# Altium PCB mew-0.2.1-full-tsc.pcbdoc (part 2 of 2)
Units mil, origin at the board's own origin, x right, y up, seen from the top; angles counter-clockwise.
Board outline 3463 x 2680.79 mil, 2 copper layers (Top Layer, Bottom Layer); 49 components, 103 nets, 267 pads, 123 vias.
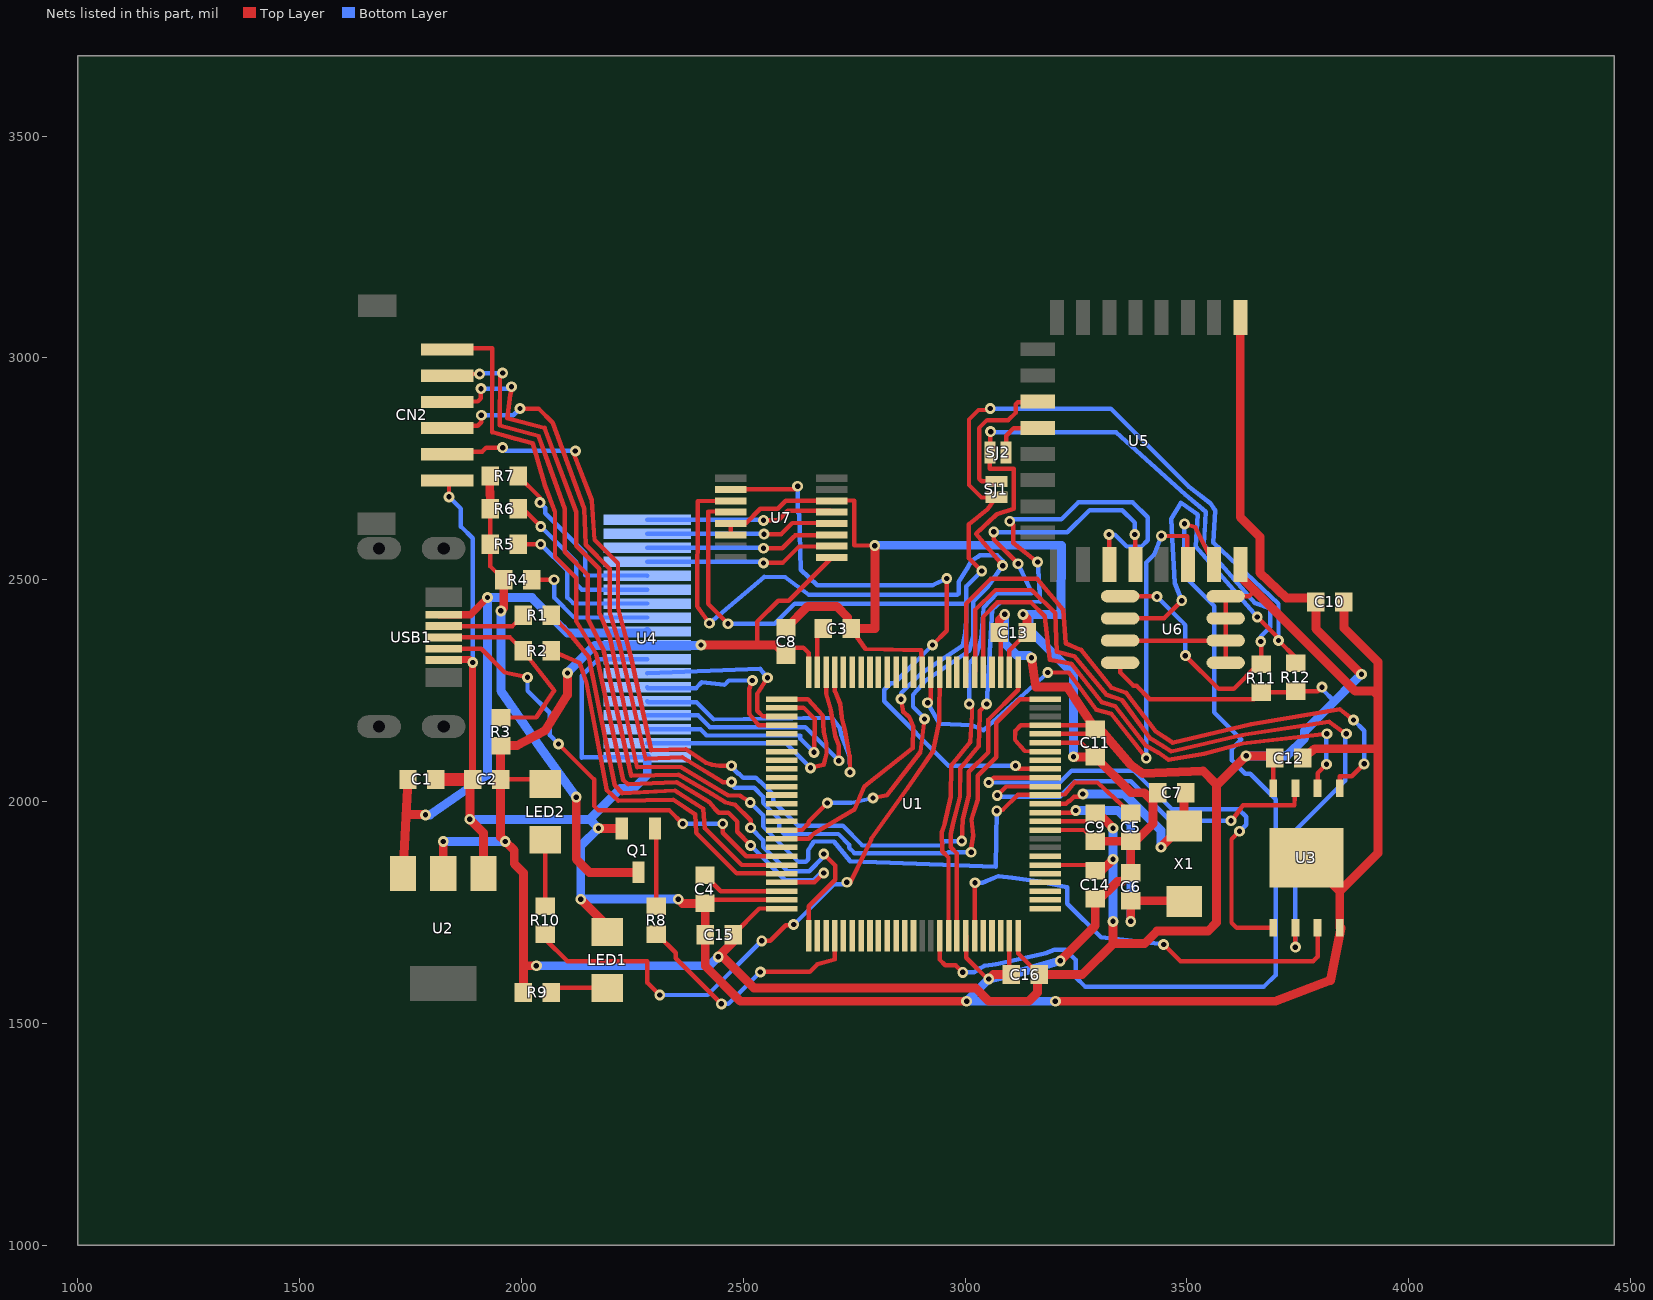
[diagram p2: the nets of this part, all layers, seen from the top]

## Via types
v1: diameter 24.4, hole 12, Top Layer to Bottom Layer, 123 vias

## Nets (pads, with @x,y where several pads share a name; then routed paths per layer and width w, separated by ;. In a path a pad name is that pad's centre, name@x,y a point inside that pad or via, vN(x,y) a via of type N, cw(c..) or ccw(c..) an arc to the next point about the centre after c; other vN are vias at no path point)
3UY46H: U1.96
$BoardOutlineNet: 
BT_MISO: U1.93 U5.19 | length 1656.9
  Top Layer w10: U1.93@2981.5,1697.8 2981.5,1882.8 2967.5,1896.8 2967.5,1925.8 2972.5,1947.8 2988.5,2010.8 2989.5,2074.8 3030.5,2124.8 3033.5,2196.8 3033.5,2204.8 v1(3048.5,2219.8) ; v1(3100.5,2631.8) 3108.5,2623.8 3108.5,2582.8 v1(3163.5,2539.8) ; v1(3324.5,2601.8) 3325,2601.3 U5.19@3325,2534.5
  Bottom Layer w10: v1(3048.5,2219.8) 3061.5,2433.8 3079.5,2448.8 3169.5,2450.8 v1(3163.5,2539.8) ; v1(3100.5,2631.8) 3104.5,2635.8 3216.5,2635.8 3255.5,2674.8 3377.5,2674.8 3411.5,2640.8 3411.5,2588.8 3397.5,2574.8 3364.5,2574.8 3337.5,2601.8 v1(3324.5,2601.8)
BT_MOSI: U1.92 U5.20 | length 1509.4
  Top Layer w10: U1.92@2962.5,1697.8 2962.5,1873.8 2948.5,1887.8 2947.5,1930.8 2954.5,1950.8 2967.5,2010.8 2968.5,2080.8 3011.5,2133.8 3015.5,2195.8 3015.5,2213.8 v1(3009.5,2219.8) ; v1(3064.5,2607.8) 3064.5,2590.8 v1(3119.5,2535.8) ; v1(3382.5,2601.8) 3384,2600.3 U5.20@3384,2534.5
  Bottom Layer w10: v1(3009.5,2219.8) 3009.5,2310.8 3025.5,2329.8 3036.1,2366.3 3041.5,2436.8 3072.5,2469.8 3150.5,2469.8 v1(3119.5,2535.8) ; v1(3064.5,2607.8) 3065.5,2606.8 3230.5,2606.8 3280.5,2656.8 3354.5,2656.8 3382.5,2628.8 v1(3382.5,2601.8)
BT_PWR_ON: U1.36 U5.22 | length 1369.3
  Top Layer w10: v1(2915.5,2222.8) 2922.5,2229.8 U1.36@2922.5,2291.8 ; v1(3186.5,2290.8) 3233.5,2290.8 3295.5,2206.8 3329.5,2197.8 v1(3408.5,2097.8) ; v1(3442.5,2598.8) 3500.5,2597.8 3500.5,2581.8 U5.22@3502.1,2534.8
  Bottom Layer w10: v1(2915.5,2222.8) 2942.5,2174.8 3014.5,2171.8 3041.5,2160.8 v1(3186.5,2290.8) ; v1(3408.5,2097.8) 3408.5,2538.8 3425.5,2555.8 v1(3442.5,2598.8)
BT_RESET: U1.91 U5.23 | length 2153.8
  Top Layer w10: U1.91@2942.5,1697.8 2942.5,1643.8 2955.5,1630.8 2978.5,1630.8 v1(2994.5,1614.8) ; v1(3494.5,2625.8) 3518.5,2618.8 U5.23@3561.2,2534.8 ; U5.23@3561.2,2534.8 3558.5,2531.8 U5.23@3561.2,2534.8
  Bottom Layer w10: v1(2994.5,1614.8) 3019.5,1614.8 3033.5,1623.8 3044.5,1629.8 3069.5,1632.8 3181.5,1657.8 3201.5,1665.8 3226.5,1665.8 3249.5,1642.8 3249.5,1603.8 3270.5,1582.8 3673.5,1582.8 3700.5,1608.8 3700.5,2004.8 3642.5,2062.8 3631.5,2062.8 3601.5,2092.8 3601.5,2118.8 3622.5,2139.8 3561.5,2200.8 3561.5,2440.6 3494.5,2507.6 v1(3494.5,2625.8)
BT_SCL: R12.2 SJ1.1 U1.67 U6.6 U7.12 | length 4054.9
  Top Layer w9: v1(3056.5,2885.8) 3053.5,2882.8 3030.5,2882.8 3008.5,2860.8 3008.5,2713.8 3036.5,2685.8 SJ1.1@3070.5,2685.8
  Top Layer w10: v1(2465.5,2400.8) 2420.5,2445.8 2420.5,2653.8 U7.12@2471.5,2652.8 ; U1.67@2586.5,1915.8 2647.5,1915.8 2660.5,1928.8 2750.5,1981.8 2773.5,2034.8 2881.5,2119.8 2883.5,2167.8 2874.5,2189.8 2860.5,2201.8 v1(2855.5,2230.8) ; v1(3037.5,2519.8) 3008.5,2548.8 3008.5,2624.8 3050.5,2658.8 SJ1.1@3070.5,2685.8 ; U6.6@3349.5,2412.8 3448.5,2412.8 v1(3488.5,2452.8) ; v1(3658.5,2415.8) 3706.5,2367.8 v1(3706.5,2362.8) 3745.5,2323.8 R12.2@3745.5,2311.4
  Bottom Layer w10: v1(2465.5,2400.8) 2570.5,2400.8 2615.5,2445.8 2736.5,2445.8 3002.5,2446.1 3002.5,2439.8 ; v1(2855.5,2230.8) 2855.5,2243.8 2900.5,2288.8 2994.5,2351.8 3000.5,2379.8 3002.5,2408.8 3002.5,2484.8 v1(3037.5,2519.8) ; v1(3056.5,2885.8) 3328.5,2885.8 3504.5,2709.8 3552.5,2672.8 3563.5,2656.8 3559.5,2583.8 3706.5,2445.8 v1(3706.5,2362.8) ; v1(3488.5,2452.8) 3472.5,2492.8 3468.5,2571.8 3464.5,2636.8 3486.5,2673.8 3524.5,2646.8 3519.5,2574.8 v1(3658.5,2415.8)
BT_SDA: R11.1 SJ2.1 U1.66 U6.5 U7.11 | length 3921.8
  Top Layer w10: v1(2423.5,2401.8) 2396.5,2439.8 2397.5,2676.8 U7.11@2471.5,2677.8 ; U1.66@2586.6,1935.7 2632.5,1935.7 2647.5,1950.8 2647.5,1954.8 v1(2689.5,1996.8) ; v1(2792.5,2007.8) 2823.5,2013.8 2899.5,2111.8 v1(2908.5,2185.8) ; v1(3057.5,2833.8) 3056.5,2832.8 SJ2.1@3056.5,2786.8 3055.5,2749.8 3109.2,2749.8 3109.5,2659.8 3071.5,2647.8 3024.5,2603.8 v1(3084.5,2531.8) ; U6.5@3349.5,2462.8 3431.5,2462.8 v1(3432.5,2461.8) ; v1(3496.5,2328.8) 3571.5,2253.8 3605.5,2253.8 3660.9,2309.2 3667.5,2309.2 3667.5,2359.8 v1(3666.5,2360.8)
  Bottom Layer w10: v1(2423.5,2401.8) 2547.5,2506.8 2594.5,2505.8 2647.5,2465.8 2982.5,2465.8 2985.5,2468.8 2985.5,2493.8 3005.5,2526.8 3014.4,2542.8 3033.5,2554.8 3072.5,2554.8 3084.5,2542.8 v1(3084.5,2531.8) 3051.3,2483.6 3018.5,2450.8 3018.5,2372.8 3009.5,2339.8 2911.5,2272.8 2882.5,2240.8 2882.5,2213.8 2908.5,2187.8 v1(2908.5,2185.8) ; v1(2689.5,1996.8) 2743.5,1996.8 v1(2792.5,2007.8) ; v1(3057.5,2833.8) 3058.5,2832.8 3340.5,2832.8 3496.5,2691.8 3542.5,2652.8 3538.5,2579.8 3654.5,2446.8 3687.5,2435.5 3687.5,2392.8 3666.5,2371.8 v1(3666.5,2360.8) ; v1(3432.5,2461.8) 3496.5,2397.8 v1(3496.5,2328.8)
DISP_BL: R8.1 U1.79 | length 567
  Top Layer w10: R8.1@2303.55,1700.4 2305.9,1700.4 2347.5,1658.8 2347.5,1646.8 v1(2450.5,1543.8) ; v1(2538.5,1615.8) 2649.5,1615.8 2666.5,1632.8 2706.5,1643.8 U1.79@2706.65,1697.65
  Bottom Layer w10: v1(2450.5,1543.8) 2466.5,1543.8 v1(2538.5,1615.8)
DISP_CS: U1.47 U4.5 | length 796.8
  Top Layer w10: U1.47@2706.5,2291.8 2706.5,2248.8 2718.5,2219.8 2721.5,2190.8 2729.5,2157.8 2739.5,2102.8 v1(2740.5,2065.8)
  Bottom Layer w10: U4.5@2283.5,2225.8 2285.5,2223.8 2394.5,2223.8 2433.5,2184.8 2700.5,2188.8 2717.5,2165.8 2720.5,2150.8 2739.5,2100.8 v1(2740.5,2065.8)
DISP_DC: U1.48 U4.4 | length 678.2
  Top Layer w10: U1.48@2686.5,2291.8 2686.5,2243.8 2697.5,2205.8 2702.5,2174.8 2707.5,2147.8 2715.5,2124.8 v1(2715.5,2091.8)
  Bottom Layer w10: U4.4@2283.5,2194.3 2398,2194.3 2424.5,2167.8 2639.5,2167.8 v1(2715.5,2091.8)
DM: R1.1 USB1.2 | length 200.3
  Top Layer w10: USB1.2@1813.9,2395.4 1979.7,2395.4 R1.1@2004.1,2419.75
DP: R2.1 R3.1 USB1.3 | length 467.9
  Top Layer w10: USB1.3@1813.9,2369.8 1953.5,2369.8 1974.1,2369.8 R2.1@2004.1,2339.75 2073.5,2249.8 2033.5,2190.4 R3.1@1953.5,2189.2
DUART-RX: CN2.2 U1.26 | length 2245.2
  Top Layer w10: CN2.2@1827.51,2786.8 1829.51,2788.8 1911.5,2788.8 1920.5,2797.8 v1(1957.5,2797.8) ; v1(2121.5,2790.24) 2117.1,2785.8 2158.5,2679.8 2164.5,2589.8 2217.5,2536.8 2217.5,2436.8 2247.5,2322.8 2292.5,2115.8 2370.7,2117.9 2415.5,2087.8 2429.5,2082.8 2445.5,2080.8 v1(2473.5,2080.8) ; v1(2992.5,1910.8) 2994.5,1959.8 3008.5,2012.8 3008.5,2066.8 3052.5,2110.8 3052.5,2184.8 3119.5,2251.8 U1.26@3119.5,2291.8
  Bottom Layer w10: v1(1957.5,2797.8) 1965.06,2790.24 v1(2121.5,2790.24) ; v1(2473.5,2080.8) 2479.5,2074.8 2479.5,2071.8 2488.5,2062.8 2490.5,2062.8 2499.5,2053.8 2528.5,2053.8 2536.5,2045.8 2537.5,2045.8 2567.5,2015.8 2567.5,2000.8 2622.5,1945.8 2724.5,1945.8 2768.5,1900.8 2944.5,1900.8 2954.5,1910.8 v1(2992.5,1910.8)
DUART-TX: CN2.3 U1.25 | length 2373.5
  Top Layer w10: CN2.3@1827.51,2845.82 1828.49,2846.8 1901.5,2846.8 1909.5,2854.8 v1(1909.5,2870.8) ; v1(1996.5,2885.8) 2038.5,2885.8 2070.5,2853.8 2141.5,2659.8 2144.5,2578.8 2198.5,2524.8 2198.5,2427.8 2221.5,2351.8 2279.5,2096.8 2362.5,2099.8 2453.5,2043.8 v1(2473.5,2043.8) ; v1(3013.5,1885.8) 3013.5,1895.8 3018.5,1923.8 3014.5,1959.8 3028.5,2003.8 3028.5,2057.8 3070.5,2099.8 3070.5,2177.8 3123.5,2230.8 U1.25@3180.5,2230.8
  Bottom Layer w10: v1(1909.5,2870.8) 1981.5,2870.8 v1(1996.5,2885.8) ; v1(2473.5,2043.8) 2480.5,2030.8 2524.5,2030.8 2544.5,2010.8 2544.5,1996.8 2581.5,1959.8 2581.5,1936.8 2591.5,1926.8 2714.5,1926.8 2738.5,1902.8 2738.5,1895.8 2750.5,1883.8 2960.5,1883.8 2962.5,1885.8 v1(3013.5,1885.8)
FLASH-CS: U1.16 U3.1 | length 1117.3
  Top Layer w10: v1(3053.5,2042.8) 3064.5,2053.8 U1.16@3180.5,2053.8 ; v1(3618.5,1932.8) 3600.5,1914.8 3600.5,1726.8 3612,1715.3 U3.1@3694.5,1715.3
  Bottom Layer w10: v1(3053.5,2042.8) 3213.5,2042.8 3240.5,2069.8 3379.5,2069.8 3466.5,1982.8 3616.5,1982.8 3633.5,1965.8 3633.5,1947.8 v1(3618.5,1932.8)
FLASH-HOLD: U1.15 U3.7 | length 894.8
  Top Layer w10: v1(3072.5,2013.8) 3092.5,2033.8 U1.15@3180.5,2033.8 ; v1(3599.5,1956.8) 3607.5,1964.8 3626.5,1991.8 3742.5,1991.8 U3.7@3744.5,2030.3
  Bottom Layer w10: v1(3072.5,2013.8) 3075.5,2010.8 3213.5,2010.8 3248.5,2045.8 3373.5,2045.8 3462.5,1956.8 v1(3599.5,1956.8)
FLASH-WP: U1.95 U3.3 | length 1051.8
  Top Layer w10: U1.95@3021.5,1697.8 3021.5,1815.8 v1(3022.5,1816.8) ; v1(3447.5,1677.8) 3485.5,1639.8 3784.5,1639.8 3794.5,1649.8 U3.3@3794.5,1715.8
  Bottom Layer w10: v1(3022.5,1816.8) 3039.5,1816.8 3075.5,1831.8 3106.5,1827.8 3170.5,1818.8 3230.5,1806.8 3230.5,1769.8 3306.7,1693.6 v1(3447.5,1677.8)
GND: C1.2 C2.2 C3.1 C4.1 C5.1 C6.1 C7.1 C8.1 C9.1 C10.1 C11.1 C12.1 C13.1 C14.1 C15.1 C16.1 CN2.1 LED1.2 Q1.2 U1.10 U1.20 U1.27 U1.37 U1.74 U1.94 U1.99 U2.1 U3.0 U3.4 U4.1 U4.8 U5.24 U6.1 U6.2 U6.3 U6.4 U6.7 U7.6 U7.13 U7.14 USB1.5 | length 10476.7
  Top Layer w10: CN2.1@1827.38,2727.68 1836.5,2718.56 v1(1836.5,2686.8) ; C4.1@2413.5,1770.4 2421.9,1778.8 U1.74@2586.5,1778.8 ; U7.14@2471.5,2600.8 U7.13@2471.5,2626.8 2505.5,2626.8 2538.5,2659.8 2577.5,2659.8 2595.5,2677.8 U7.6@2699.5,2677.8 2700.5,2678.8 2750.5,2677.8 2750.5,2577.8 2793.5,2576.8 v1(2796.5,2576.8) ; C3.1@2742.9,2389.85 2775.5,2343.8 2901.5,2340.8 U1.37@2903.5,2291.8 ; U1.94@3001.5,1697.8 3002.5,1696.8 3002.5,1647.8 3050.5,1599.8 v1(3053.5,1599.8) ; U1.99@3099.5,1697.8 3099.5,1614.4 C16.1@3104.1,1609.75 ; U1.27@3099.5,2291.8 3099.5,2340.4 C13.1@3139.9,2380.85 ; U1.10@3180.5,1935.8 3268.1,1935.8 C9.1@3293.5,1910.4 ; U1.20@3180.5,2132.8 3261.1,2132.8 C11.1@3293.5,2100.4 ; U6.7@3349.5,2362.8 U6.2@3587.5,2362.8 ; U6.1@3587.5,2312.8 U6.2@3587.5,2362.8 ; 3652.7,2475.6 3639.9,2462.8 U6.4@3587.5,2462.8 U6.3@3587.5,2412.8 U6.2@3587.5,2362.8
  Top Layer w16: USB1.5@1813.9,2318.6 1815.1,2319.8 1883.5,2319.8 v1(1889.91,2313.39) C2.2@1889.9,2049.85
  Top Layer w20: C2.2@1889.9,2049.85 1883.5,2043.4 v1(1883.5,1959.8) 1914.1,1929.2 U2.1@1914.1,1837.8 ; v1(2133.5,1779.8) 2193.5,1719.8 LED1.2@2193.5,1705.8 ; v1(2173.5,1939.8) 2174.3,1939 Q1.2@2226.1,1939 ; v1(2353.5,1779.8) 2362.9,1770.4 2413.5,1770.4 2414.1,1769.8 C15.1@2414.1,1699.75 2414.1,1629.2 2493.5,1549.8 v1(3003.5,1549.8) ; C8.1@2596.5,2392.2 2597.9,2392.2 2645.5,2439.8 2710.5,2439.8 2735.5,2414.8 2735.5,2397.2 C3.1@2742.9,2389.85 2796.5,2389.8 v1(2796.5,2576.8) ; v1(3053.5,1599.8) 3063.5,1609.8 C16.1@3104.1,1609.75 ; v1(3130.5,2421.8) 3139.9,2412.4 C13.1@3139.9,2380.85 ; v1(3203.5,1549.8) 3699.5,1549.8 3823.5,1596.8 3847.2,1714.8 U3.4@3844.5,1715.3 3844.5,1797.8 ; v1(3214.5,1640.8) 3293.5,1719.8 3293.5,1780.4 3304.1,1780.4 3333.5,1809.8 3343.5,1819.8 3354.1,1819.8 3373.5,1839.2 C5.1@3373.5,1910.4 ; v1(3244.5,2100.8) 3244.9,2100.4 3293.5,2100.4 3374.1,2019.8 3403.5,2019.8 3423.5,1999.8 3423.5,1949.8 3384.1,1910.4 C5.1@3373.5,1910.4 ; C9.1@3293.5,1910.4 C5.1@3373.5,1910.4 ; 3423.5,1983.5 3423.5,2009.2 C7.1@3434.1,2019.75 ; U5.24@3620.3,2534.5 3620.3,2508 3879.5,2248.8 3921.5,2248.8 3930.5,2239.8 ; C12.1@3760.9,2097.85 3788.5,2118.8 3930.5,2118.8 ; U3.0@3769.5,1872.8 3844.5,1797.8 ; C10.1@3853.9,2449.85 3853.9,2391.4 3930.5,2314.8 3930.5,2239.8 ; 3844.5,1797.8 3930.5,1883.8 3930.5,2118.8 ; 3930.5,2118.8 3930.5,2239.8
  Top Layer w30: C1.2@1807.1,2049.75 C2.2@1889.9,2049.85
  Bottom Layer w10: v1(1836.5,2686.8) 1863.5,2659.8 1863.5,2619.8 1889.9,2593.4 v1(1889.91,2313.39) ; U4.1@2283.5,2099.8 2136.5,2099.8 2135.5,2098.8 2135.5,2283.8 2172.5,2320.8 2282.97,2320.8 U4.8@2283.5,2320.3
  Bottom Layer w20: v1(1883.5,1959.8) 2153.5,1959.8 ; U4.1@2283.5,2099.8 2283.5,2059.8 2253.5,2029.8 2223.5,2029.8 2153.5,1959.8 ; v1(2353.5,1779.8) v1(2133.5,1779.8) 2133.5,1899.8 v1(2173.5,1939.8) 2153.5,1959.8 ; v1(2796.5,2576.8) 2797.5,2577.8 3216.9,2577.8 3216.5,2421.8 v1(3130.5,2421.8) 3144.5,2407.8 3144.5,2386.8 3244.5,2286.8 v1(3244.5,2100.8) ; v1(3203.5,1549.8) v1(3003.5,1549.8) v1(3053.5,1599.8) 3131.5,1616.8 v1(3214.5,1640.8)
ID: U1.69 USB1.4 | length 1056.5
  Top Layer w10: USB1.4@1813.9,2344.2 1909.1,2344.2 1962.4,2290.9 v1(2013.5,2279.8) ; v1(2083.5,2129.8) 2163.5,2049.8 2163.5,1989.8 2173.5,1979.8 2333.5,1979.8 v1(2363.5,1949.8) ; v1(2453.5,1949.8) 2453.5,1929.8 2506.5,1876.8 U1.69@2586.5,1876.8
  Bottom Layer w10: v1(2013.5,2279.8) 2013.5,2249.8 2063.5,2199.8 2063.5,2149.8 v1(2083.5,2129.8) ; v1(2363.5,1949.8) v1(2453.5,1949.8)
Q1_1: Q1.1 R8.2 | length 176.7
  Top Layer w10: Q1.1@2300.9,1939 2303.5,1936.4 R8.2@2303.5,1763.4
R4_2: Q1.3 R4.2 R5.2 R6.2 R7.2 | length 1071.1
  Top Layer w10: R6.2@1929.9,2659.85 R5.2@1929.9,2579.85 1929.9,2529.8 R4.2@1959.9,2499.85
  Top Layer w20: R7.2@1929.5,2718.8 1928.5,2714.8 R6.2@1929.9,2659.85 ; v1(1953.5,2429.8) 1959.9,2436.2 R4.2@1959.9,2499.85 ; v1(2123.5,2009.8) 2123.5,1869.8 2153.5,1839.8 2262.7,1839.8 Q1.3@2263.5,1840.6
  Bottom Layer w20: v1(1953.5,2429.8) 1953.5,2249.8 2043.5,2119.8 v1(2123.5,2009.8)
R9_2: LED1.1 R9.2 | length 130.5
  Top Layer w10: R9.2@2067.1,1569.75 2077.1,1579.8 LED1.1@2193.5,1579.8
R10_2: LED2.2 R10.2 | length 150.4
  Top Layer w10: R10.2@2053.5,1763.4 LED2.2@2053.5,1913.8
RESET: C5.2 CN2.4 U1.14 | length 2598.6
  Top Layer w10: CN2.4@1827.55,2904.39 1830.14,2901.8 1901.5,2901.8 1908.5,2908.8 v1(1908.5,2930.8) ; v1@1982.5,2938.8 1981,2938.9 1974.5,2916.8 1967.5,2863.8 2051.9,2842.2 2123.5,2652.9 2123.5,2576.8 2175.5,2524.8 2175.5,2424.8 2198.8,2371.2 2260.5,2076.8 2358.5,2077.8 2466.5,2013.8 2493.5,2012.8 2511.5,2001.8 v1@2520.5,2001.8 ; v1(3071.5,1978.8) 3073.5,1980.8 3084.5,1980.8 3118.5,2014.8 3180.5,2014.8 3224.5,2015.8 3247.5,2043.8 3298.5,2042.8 C5.2@3373.5,1973.4
  Bottom Layer w10: v1(1908.5,2930.8) 1977.5,2930.8 v1(1977.5,2934.8) ; v1(2515.5,1997.8) 2544.5,1968.8 2544.5,1943.8 2624.5,1863.8 2640.5,1863.8 2646.5,1869.8 2646.5,1889.8 2658.5,1908.8 2704.5,1909.8 2740.5,1865.8 3069.5,1852.8 v1(3071.5,1978.8)
S$67: 
S$69: 
S$103: 
S$105: 
S$107: 
SPI1-MISO: U1.31 U3.2 | length 1784.9
  Top Layer w10: U1.31@3021.5,2291.8 3022.5,2292.8 3022.5,2431.8 3068.5,2476.8 3150.5,2476.8 3203.5,2424.8 3206.5,2337.8 3246.5,2327.8 3318.5,2240.8 3353.5,2228.8 3416.5,2142.8 3447.5,2123.8 3464.5,2112.8 3624.5,2149.8 3820.5,2179.8 3857.5,2152.8 v1(3859.5,2152.8) ; v1(3744.5,1671.8) U3.2@3744.5,1715.3
  Bottom Layer w10: v1(3744.5,1671.8) 3744.5,1934.8 3856.5,2046.8 3856.5,2149.8 v1(3859.5,2152.8)
SPI2_MOSI: U1.54 U4.6 | length 409.2
  Top Layer w10: v1(2520.5,2272.8) 2513.5,2253.8 2513.5,2197.8 2534.5,2171.8 U1.54@2586.5,2171.8
  Bottom Layer w10: U4.6@2283.5,2257.3 2285,2255.8 2393.5,2255.8 2406.5,2268.8 2457.5,2262.8 2467.5,2272.8 v1(2520.5,2272.8)
TS_EISR_1: U1.17 U7.10 | length 1460.3
  Top Layer w10: U7.10@2471.5,2703.8 2563,2703.8 2622.5,2703.8 v1(2622.5,2710.8) ; v1(2926.5,2352.8) 2958.5,2384.8 v1(2958.5,2502.8) ; v1(3113.5,2080.8) 3120.6,2073.7 U1.17@3180.6,2073.7
  Bottom Layer w10: v1(2622.5,2710.8) 2622.5,2651.8 2626.5,2647.8 2629.5,2522.8 2666.5,2487.8 2927.5,2487.8 v1(2958.5,2502.8) ; v1(2926.5,2352.8) 2840.5,2266.8 2832.5,2266.8 2817.5,2251.8 2817.5,2225.8 2962.5,2080.8 v1(3113.5,2080.8)
U1_1: U1.1
U1_2: U1.2
U1_3: U1.3
U1_4: U1.4
U1_5: U1.5
U1_7: U1.7
U1_12: C6.2 U1.12 X1.2 | length 594.5
  Top Layer w10: U1.12@3180.5,1974.8 3244.5,1974.8 v1(3249.5,1979.8)
  Top Layer w20: v1(3373.5,1729.8) 3373.5,1776.2 3492.1,1776.2 X1.2@3493.5,1774.8
  Bottom Layer w20: v1(3249.5,1979.8) 3343.5,1979.8 3373.5,1949.8 v1(3373.5,1729.8)
U1_13: C7.2 U1.13 X1.1 | length 490.5
  Top Layer w10: U1.13@3180.5,1994.8 3227.5,1994.8 3234.5,2001.8 3236.5,2001.8 3245.5,2010.8 3259.5,2010.8 v1(3265.5,2016.8)
  Top Layer w20: v1(3441.5,1896.8) 3489.5,1944.8 X1.1@3493.5,1944.8 3493.5,2016.2 C7.2@3497.1,2019.75
  Bottom Layer w20: v1(3265.5,2016.8) 3359.5,2016.8 3441.5,1934.8 v1(3441.5,1896.8)
U1_18: U1.18
U1_29: U1.29
U1_30: U1.30 U3.6 | length 1247.2
  Top Layer w10: U1.30@3040.5,2291.8 3040.5,2415.8 3072.5,2448.8 3148.5,2448.8 3179.5,2417.8 3190.5,2319.8 3239.5,2310.8 3308.5,2223.8 3338.5,2214.8 3407.5,2125.8 3436.5,2109.8 3458.5,2093.8 3539.5,2107.8 3625.5,2130.8 v1(3815.5,2152.8) ; U3.6@3794.5,2030.3 3794.5,2063.8 v1(3814.5,2083.8)
  Bottom Layer w10: v1(3814.5,2083.8) 3814.5,2151.8 v1(3815.5,2152.8)
U1_32: U1.32 U3.5 | length 1468.2
  Top Layer w10: U1.32@3001.5,2291.8 3002.5,2292.8 3002.5,2446.1 3057.2,2501.8 3162.3,2501.8 3221.5,2431.8 3226.5,2356.8 3261.5,2341.8 3329.5,2256.8 3363.5,2244.8 3429.5,2157.8 3467.5,2132.8 3644.5,2173.8 3844.5,2207.8 v1(3875.5,2183.8) ; U3.5@3844.5,2030.3 3844.5,2056.8 3871.5,2056.8 v1(3899.5,2084.8)
  Bottom Layer w10: v1(3875.5,2183.8) 3899.5,2159.8 v1(3899.5,2084.8)
U1_33: U1.33
U1_34: U1.34
U1_35: R10.1 U1.35 | length 1414.4
  Top Layer w10: R10.1@2053.5,1700.4 2053.5,1689.8 2103.5,1639.8 2283.5,1639.8 2283.5,1591.8 v1(2311.5,1563.8) ; v1(2541.5,1685.8) 2560.5,1685.8 2595.5,1720.8 2611.5,1720.8 v1(2613.5,1722.8) ; v1(2733.5,1817.8) 2741.5,1817.8 2788.5,1915.8 2870.5,2030.8 2928.5,2114.8 2941.5,2180.8 U1.35@2942.5,2291.8
  Bottom Layer w10: v1(2311.5,1563.8) 2419.5,1563.8 v1(2541.5,1685.8) ; v1(2613.5,1722.8) 2614.5,1722.8 2705.5,1813.8 2729.5,1813.8 v1(2733.5,1817.8)
U1_38: U1.38
U1_39: U1.39
U1_40: U1.40
U1_41: U1.41
U1_42: U1.42
U1_43: U1.43
U1_44: U1.44
U1_45: U1.45
U1_46: U1.46
U1_49: C3.2 U1.49 | length 103.6
  Top Layer w10: U1.49@2666.5,2291.8 2666.5,2376.4 C3.2@2679.9,2389.85
U1_51: U1.51 U4.2 | length 643.5
  Top Layer w10: U1.51@2586.5,2230.8 2645.5,2230.8 2679.5,2193.8 2681.5,2156.8 2687.5,2129.8 2687.5,2107.8 2681.5,2082.8 v1(2651.5,2075.8)
  Bottom Layer w10: U4.2@2283.5,2131.3 2596,2131.3 v1(2651.5,2075.8)
U1_52: U1.52 U4.3 | length 561.9
  Top Layer w10: U1.52@2586.5,2211.8 2635.5,2211.8 2661.2,2186.1 v1(2659.5,2110.8)
  Bottom Layer w10: U4.3@2283.5,2162.8 2403.5,2162.8 2416.5,2149.8 2628.5,2148.8 2628.5,2141.8 v1(2659.5,2110.8)
U1_53: U1.53 U4.7 | length 421.9
  Top Layer w10: v1(2554.5,2278.8) 2531.5,2242.8 2531.5,2204.8 2544.5,2191.8 U1.53@2586.5,2191.8
  Bottom Layer w10: U4.7@2283.5,2288.8 2538.5,2298.8 v1(2554.5,2278.8)
U1_55: U1.55
U1_56: U1.56
U1_57: U1.57
U1_58: U1.58
U1_59: U1.59
U1_60: U1.60
U1_61: U1.61
U1_62: U1.62
U1_63: U1.63
U1_64: U1.64
U1_65: U1.65
U1_70: R1.2 U1.70 | length 891.9
  Top Layer w10: R1.2@2067.1,2419.75 2107.1,2379.8 2151.5,2325.8 2210.5,2036.8 2227.5,2018.8 2345.5,2024.8 2409.5,1983.8 2413.5,1939.8 2496.5,1856.8 U1.70@2586.5,1856.8
U1_71: R2.2 U1.71 | length 853.7
  Top Layer w10: R2.2@2067.1,2339.75 2131.5,2311.8 2146.5,2267.8 2192.5,2025.8 2218.5,2001.8 2342.5,2003.8 2391.5,1970.8 2393.5,1929.8 2485.5,1837.8 U1.71@2586.5,1837.8
U1_72: CN2.6 U1.72 | length 1863
  Top Layer w10: CN2.6@1828.5,3021.8 1934.5,3021.8 1933.5,2832.8 1986.5,2817.8 2025.5,2807.8 2052.5,2713.8 2075.5,2652.8 2075.5,2551.8 2123.5,2503.8 2123.5,2406.8 2168.5,2331.8 2229.5,2047.8 2240.5,2038.8 2348.5,2043.8 2423.5,1998.8 2435.5,1983.8 2444.5,1974.8 2466.5,1974.8 2486.5,1954.8 2486.5,1931.8 v1(2516.5,1900.8) ; U1.72@2586.5,1817.8 2660.5,1817.8 v1(2681.5,1838.8)
  Bottom Layer w10: v1(2516.5,1900.8) 2594.5,1822.8 2658.5,1822.8 2674.5,1838.8 v1(2681.5,1838.8)
U1_73: C4.2 U1.73 | length 187.7
  Top Layer w10: C4.2@2413.5,1833.4 2449.1,1797.8 U1.73@2586.5,1797.8
U1_76: CN2.5 U1.76 | length 1931.1
  Top Layer w10: CN2.5@1827.41,2963.85 1827.46,2963.8 v1(1905.5,2963.8) ; v1(1957.5,2965.8) 1951.5,2965.8 1950.5,2847.8 2038.5,2823.8 2054.5,2778.8 2070.5,2734.8 2097.5,2659.8 2097.5,2562.8 2149.5,2510.8 2149.5,2411.8 2185.5,2338.8 2247.5,2057.8 2353.5,2060.8 2427.5,2017.8 2460.5,1997.8 2481.5,1992.8 2516.5,1957.8 v1(2516.5,1940.8) ; U1.76@2647.5,1697.8 2647.5,1763.8 2707.5,1823.8 2707.5,1855.8 v1(2681.5,1881.8)
  Bottom Layer w10: v1(1905.5,2963.8) 1907.5,2965.8 v1(1957.5,2965.8) ; v1(2516.5,1940.8) 2544.5,1912.8 2544.5,1897.8 2599.5,1842.8 2648.5,1842.8 2681.5,1875.8 v1(2681.5,1881.8)
U1_78: U1.78
U1_80: U1.80
U1_81: U1.81
U1_82: U1.82
U1_83: U1.83
U1_84: U1.84
U1_85: U1.85
U1_86: U1.86
U1_87: U1.87
U1_88: U1.88
U1_97: U1.97
U1_98: U1.98
U2_3: C1.1 U2.3 U4.10 USB1.1 | length 1344.5
  Top Layer w16: USB1.1@1813.9,2421 1884.7,2421 v1(1923.5,2459.8)
  Top Layer w20: U2.3@1732.95,1837.85 C1.1@1744.1,2049.75 ; 1739.9,1970.3 1783,1970.3 v1(1783.5,1969.8)
  Bottom Layer w20: v1(1783.5,1969.8) 1793.5,1969.8 1923.5,2059.8 1923.5,2359.8 v1(1923.5,2459.8) 2023.5,2459.8 2093.5,2389.8 2103.5,2379.8 2123.5,2379.8 2280,2379.8 U4.10@2283.5,2383.3
U4_11: R4.1 U4.11 | length 319.2
  Top Layer w10: R4.1@2022.9,2499.85 v1(2073.5,2499.8)
  Bottom Layer w10: v1(2073.5,2499.8) 2073.5,2459.8 2118.5,2414.8 U4.11@2283.5,2414.75
U4_12: R5.1 U4.12 | length 381
  Top Layer w10: R5.1@1992.9,2579.85 v1(2043.5,2579.8)
  Bottom Layer w10: v1(2043.5,2579.8) 2103.5,2519.8 2103.5,2459.8 2117,2446.3 U4.12@2283.5,2446.3
U4_13: R6.1 U4.13 | length 395.3
  Top Layer w10: R6.1@1992.9,2659.85 2003.5,2659.8 v1(2043.5,2619.8)
  Bottom Layer w10: v1(2043.5,2619.8) 2123.5,2539.8 2123.5,2489.8 2135.6,2477.7 U4.13@2283.5,2477.7
U4_14: R7.1 U4.14 | length 426.4
  Top Layer w10: R7.1@1992.9,2733.85 2041.5,2685.25 2041.5,2679.8 v1(2041.5,2673.8)
  Bottom Layer w10: v1(2041.5,2673.8) 2053.5,2661.8 2053.5,2649.8 2143.5,2559.8 2143.5,2509.8 U4.14@2283.5,2509.25
U4_15: U4.15 U7.2 | length 433
  Top Layer w10: v1(2545.5,2537.8) 2588.5,2537.8 2625.5,2574.8 2698.5,2574.8 U7.2@2699.5,2575.8
  Bottom Layer w10: U4.15@2283.5,2540.75 2542.55,2540.75 v1(2545.5,2537.8)
U4_16: U4.16 U7.3 | length 429
  Top Layer w10: v1(2545.5,2570.8) 2587.5,2570.8 2613.5,2596.8 2616.5,2599.8 2698.5,2599.8 U7.3@2699.5,2600.8
  Bottom Layer w10: U4.16@2283.5,2572.2 2544.06,2572.24 v1(2545.5,2570.8)
U4_17: U4.17 U7.4 | length 427.2
  Top Layer w10: v1(2546.5,2602.8) 2585.5,2602.8 2610.5,2627.8 2698.5,2627.8 U7.4@2699.5,2626.8
  Bottom Layer w10: U4.17@2283.5,2603.7 2545.56,2603.74 v1(2546.5,2602.8)
U4_18: U4.18 U7.5 | length 427
  Top Layer w10: v1(2545.5,2633.8) 2578.5,2633.8 2600.5,2655.8 2696.5,2655.8 U7.5@2699.5,2652.8
  Bottom Layer w10: U4.18@2283.5,2635.2 2544.07,2635.23 v1(2545.5,2633.8)
U5_11: SJ1.2 U5.11 | length 323.5
  Top Layer w10: SJ1.2@3070.5,2721.8 3037.5,2721.8 3031.5,2727.8 3031.5,2841.8 3049.5,2859.8 3097.5,2859.8 3114.5,2876.8 3114.5,2895.8 3118.5,2899.8 3162.07,2899.8 U5.11@3163.71,2901.44
U5_12: SJ2.2 U5.12 | length 116.5
  Top Layer w10: SJ2.2@3092.5,2786.8 3092.5,2824.8 3109.5,2841.8 3163.13,2841.8 U5.12@3163.71,2842.38
U69: U1.68
VCC: C2.1 C8.2 C9.2 C10.2 C11.2 C12.2 C13.2 C14.2 C15.2 C16.2 LED2.1 R3.2 R9.1 R11.2 R12.1 U1.6 U1.11 U1.19 U1.21 U1.22 U1.28 U1.50 U1.75 U1.100 U2.2 U3.8 U4.9 U5.1 U6.8 U7.1 | length 8339.9
  Top Layer w10: C2.1@1952.9,2049.85 2043.5,2049.8 LED2.1@2053.5,2039.8 ; C15.2@2477.1,1699.75 2536.1,1758.8 U1.75@2586.5,1758.8 ; 2531.37,2352.8 2531.37,2405.66 2578.5,2452.8 2602.5,2452.8 U7.1@2699.5,2549.8 ; C8.2@2596.5,2329.2 2614.1,2346.8 2635.5,2346.8 2647.5,2334.8 U1.50@2647.5,2291.8 ; C13.2@3076.9,2380.85 3080.5,2377.2 U1.28@3080.5,2291.8 ; U1.100@3119.5,1697.8 3119.5,1657.4 C16.2@3167.1,1609.75 ; U1.6@3180.5,1856.8 3280.1,1856.8 C14.2@3293.5,1843.4 ; U1.11@3180.5,1955.8 3275.9,1955.8 C9.2@3293.5,1973.4 ; U1.19@3180.5,2112.8 3134.5,2113.8 3112.5,2138.8 3113.5,2159.8 3125.5,2171.8 3180.5,2171.8 3285.1,2171.8 3293.5,2163.4 3282.9,2152.8 U1.21@3180.5,2152.8 ; U6.8@3349.5,2312.8 3349.5,2290.8 3379.5,2260.8 3386.5,2260.8 3416.5,2230.8 3652.1,2230.8 3667.5,2246.2 3743.3,2246.2 3745.5,2248.4 3795.1,2248.4 v1(3804.5,2257.8) ; U3.8@3694.5,2030.3 3694.5,2094.4 C12.2@3697.9,2097.85
  Top Layer w20: U2.2@1823.5,1837.85 v1(1823.5,1909.8) ; R9.1@2004.1,1569.75 2004.1,1839.2 1983.5,1859.8 1983.5,1889.8 v1(1963.5,1909.8) 1952.9,1920.4 C2.1@1952.9,2049.85 1952.9,2125.6 1953.5,2126.2 1989.9,2126.2 2053.5,2159.8 2103.5,2239.8 v1(2103.5,2289.8) ; 2004.1,1628.3 2005.6,1629.8 v1(2033.5,1629.8) ; v1(2404.5,2352.8) 2572.9,2352.8 C8.2@2596.5,2329.2 ; C15.2@2477.1,1699.75 2477.1,1683.4 v1(2443.5,1649.8) 2453.5,1649.8 2523.5,1579.8 3023.5,1579.8 3053.5,1549.8 3143.5,1549.8 3163.5,1569.8 3163.5,1606.2 C16.2@3167.1,1609.75 3263.5,1609.8 3333.5,1679.8 v1(3333.5,1729.8) ; C13.2@3076.9,2380.85 3076.9,2409.2 v1(3089.5,2421.8) ; C14.2@3293.5,1843.4 3307.1,1843.4 v1(3333.5,1869.8) ; C9.2@3293.5,1973.4 3299.9,1973.4 v1(3333.5,1939.8) ; 3333.5,1680.6 3334.3,1679.8 3404.5,1679.8 3432.5,1707.8 3547.5,1707.8 3566.5,1726.8 3566.5,2038.8 ; U5.1@3620.3,3091.2 3620.3,2641 3664.5,2596.8 3664.5,2515.8 3724.5,2458.8 3781.9,2458.8 C10.2@3790.9,2449.85 3790.9,2389.4 v1(3893.5,2286.8) ; C12.2@3697.9,2097.85 3692.9,2102.8 v1(3633.5,2102.8) 3603.5,2072.8 3569.5,2038.8 3566.5,2038.8 ; v1(3149.5,2323.8) 3159.5,2257.8 3230.5,2257.8 3265.5,2205.8 3293.5,2163.4 3303.9,2163.4 3371.5,2084.8 3400.5,2062.8 3536.5,2068.8 3566.5,2038.8 ; v1(3149.5,2323.8) 3150.5,2324.8 v1(3149.5,2323.8)
  Bottom Layer w10: v1(3804.5,2257.8) 3804.5,2253.7 3832.4,2225.7
  Bottom Layer w20: v1(1823.5,1909.8) v1(1963.5,1909.8) ; v1(2033.5,1629.8) 2423.5,1629.8 v1(2443.5,1649.8) ; v1(2103.5,2289.8) 2165.5,2351.8 U4.9@2283.5,2351.8 2403.5,2351.8 v1(2404.5,2352.8) ; v1(3089.5,2421.8) 3089.5,2356.8 3117.5,2328.8 3144.5,2328.8 v1(3149.5,2323.8) ; v1(3333.5,1729.8) v1(3333.5,1869.8) v1(3333.5,1939.8) ; v1(3633.5,2102.8) 3725.5,2102.8 3765.5,2142.8 3765.5,2158.8 3812.5,2205.8 v1(3893.5,2286.8)
WQE: U1.77
pads on no net: CN2.7 CN2.8 U1.8 U1.9 U1.23 U1.24 U1.89 U1.90 U2.4 U5.2 U5.3 U5.4 U5.5 U5.6 U5.7 U5.8 U5.9 U5.10 U5.13 U5.14 U5.15 U5.16 U5.17 U5.18 U5.21 U7.7 U7.8 U7.9 U7.15 U7.16 USB1. USB1.0

## Text inside footprints (layer, text, board x,y; h text height)
U4: Bottom Overlay "1" at 2283.5,1999.8 h80 r270; Bottom Overlay "18" at 2293.5,2679.8 h80 r270